# Altium PCB PCB_motor_driver_v2.PcbDoc
Units mil, origin at the board's own origin, x right, y up, seen from the top; angles counter-clockwise.
Board outline 801.46 x 841.6 mil, 4 copper layers (Top Layer, Signal Layer 1, Signal Layer 2, Bottom Layer), stack 15.634 mil thick; 56 components, 52 nets, 340 pads, 9 vias.
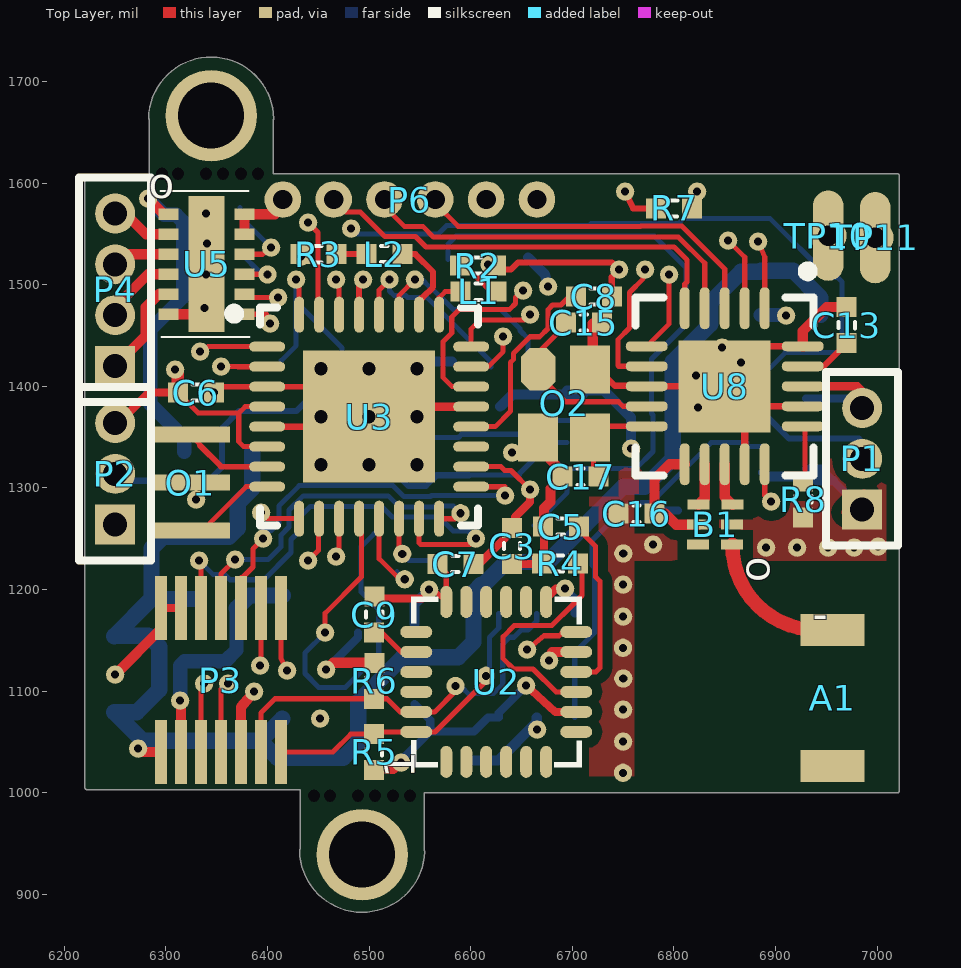
[diagram p0: Top Layer view]
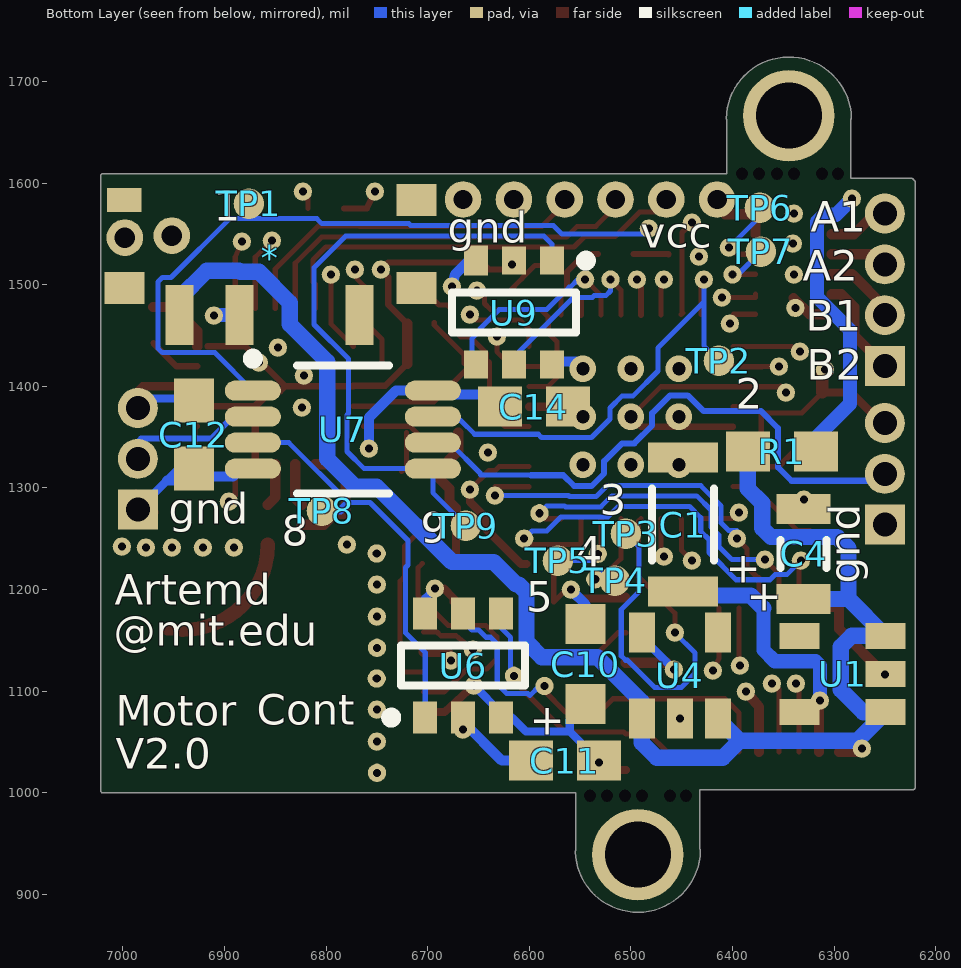
[diagram p1: Bottom Layer view, seen from below]
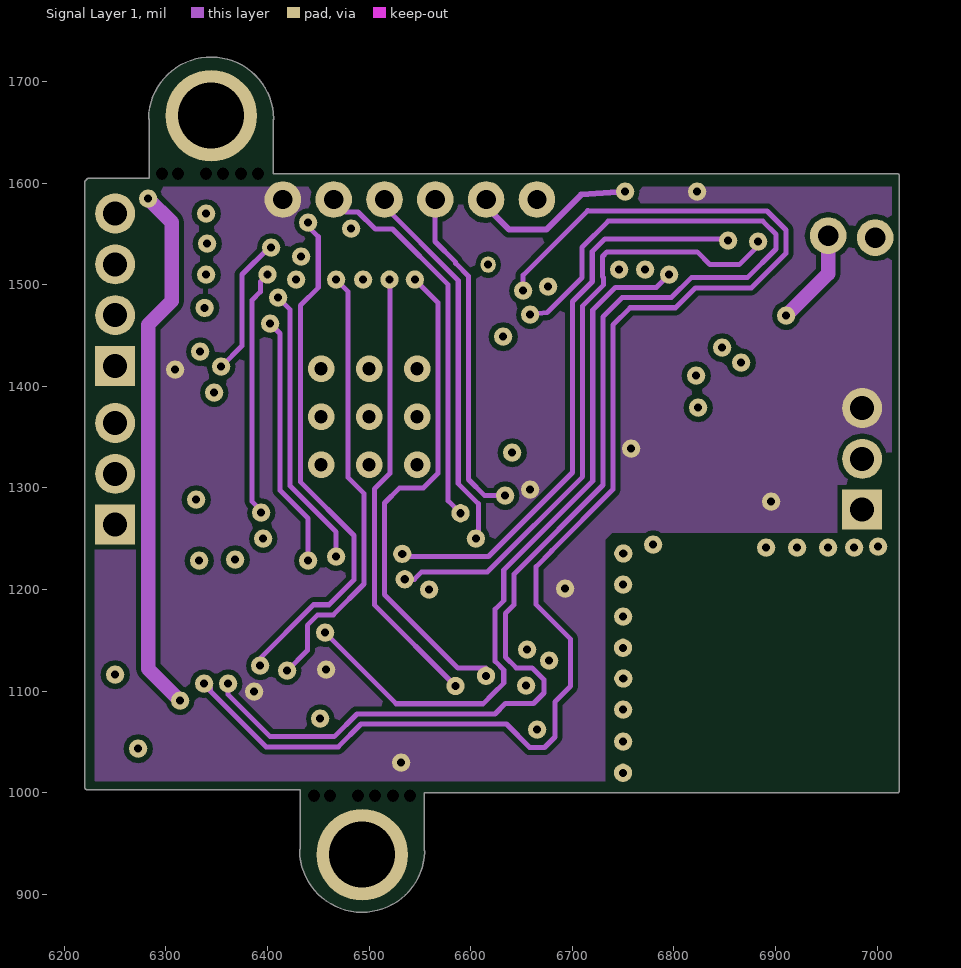
[diagram p2: Signal Layer 1]
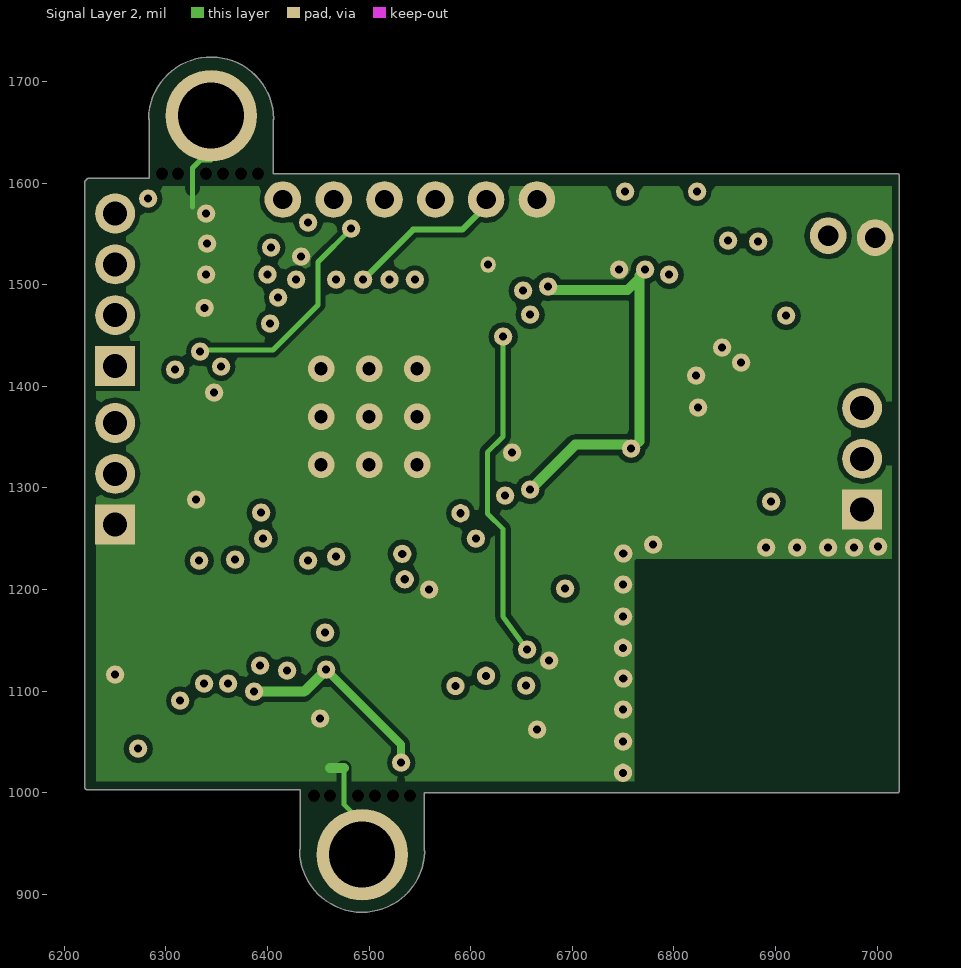
[diagram p3: Signal Layer 2]

## Layer stack, top to bottom
Top Solder: solder mask 0.4, Solder Resist, Dk 3.5
Top Layer: signal copper 1.4
Signal Layer 1: signal copper 1.417
Signal Layer 2: signal copper 1.417
Dielectric 1: core 10, FR-4, Dk 4.2
Bottom Layer: signal copper 1.4
Solder Side: solder mask 0.4, Solder Resist, Dk 3.5

## Board outline
6220.21,1005 ccw(c6222.19,1005) 6222.19,1003.02 6432.01,1003.02 ccw(c6432.01,1005) 6432.07,1003.02 ccw(c6434.06,1002.95) 6432.07,1002.95 6432.07,944.39 ccw(c6434.06,942.84) 6431.54,942.8 ccw(c6493.1,943.79) 6554.64,941.81 ccw(c6552.13,941.89) 6554.64,941.89 ccw(c6552.13,941.89) 6554.11,943.44 6554.11,999.73 7019.69,999.73 ccw(c7019.69,1001.71) 7021.67,1001.71 7021.67,1607.28 ccw(c7019.69,1607.28) 7019.69,1609.27 6405.53,1609.27 6405.49,1661.87 ccw(c6403.5,1663.42) 6406.02,1663.42 ccw(c6403.5,1663.42) 6406.02,1663.46 ccw(c6344.46,1662.47) 6282.92,1664.45 ccw(c6285.43,1664.37) 6283.45,1662.82 6283.45,1604.56 6223.64,1604.56 ccw(c6223.64,1602.58) 6221.72,1603.06 ccw(c6222.19,1601.13) 6220.21,1601.13

## Design rules (kind name [scope] priority, off if disabled: settings)
Clearance Clearance_3 [InNamedPolygon('GND-TOP')] p1: gap=10
Clearance Clearance_2 [InNamedPolygon('GND-TOP')] p2: gap=14
Clearance Clearance_1 [InNamedPolygon('GND-TOP')] p3: gap=15
Clearance [All] p4: gap=5
ComponentClearance [All] p1: gap=5 collisioncheckmode=3 verticalgap=0 showdistances=TRUE
PolygonConnect [All] p1: connectstyle=Direct reliefconductorwidth=10 reliefentries=4 polygonreliefangle="90 Angle" airgapwidth=10
RoutingLayers [All] p1: top layer_v5=FALSE mid layer 1_v5=TRUE mid layer 2_v5=TRUE bottom layer_v5=FALSE
RoutingVias [All] p1: holewidth=10 width=15 viastyle="Through Hole" minholewidth=8 minwidth=50 maxholewidth=8 maxwidth=50
SilkToSilkClearance [All] p1: silktosilkclearance=1
SilkToSolderMaskClearance [IsPad] p1: minsilkscreentomaskgap=1 clearancetoexposedcopper=TRUE
SolderMaskExpansion [All] p1: expansion=4
Width [All] p1: maxlimit=78.74 minlimit=5 preferedwidth=5
26 further rules are at their usual default settings.

## Components (designator, comment, footprint, x,y, rotation, side; value= is the part's Value field where it differs from the comment)
* "ON_OFF_SWITCH" SWTICH_SMD_SIDE 6775,1600 r0 bottom
A1 "2.45 GHz Chip antenna" 2450AT18A100E 6951.77,1149.61 r270 top
B1 "2.45 GHz Bulan" 2450BM14A0002 6856.3,1279.53 r270 top
C1 "100uF 6.3V" CAP1206 6448.82,1263.78 r90 bottom
C3 "0.1uF" 0402W 6640.75,1257.87 r270 top
C4 "10uF 16V" CAP0805 6330,1235 r90 bottom
C5 "0.1uF" 0402W 6703.74,1261.81 r180 top
C6 "0.1uF" 0402W 6344.49,1393.7 r180 top
C7 "10nF" 0402W 6600,1225 r180 top
C8 "0.1uF" 0402W 6736.22,1488.19 r180 top
C9 "2200pF" 0402W 6505,1160 r90 top
C10 "10uF 6.3V" "0805 TANTALUM" 6543.31,1098.43 r90 bottom
C11 "0.1uF" 0603W 6565.94,1031.5 r180 bottom
C12 "0.1uF" 0603W 6930.12,1351.38 r90 bottom
C13 "33nF X7R, +/- 10%" 0402W 6970,1445 r90 top
C14 "0.1uF" 0603W 6594.49,1379.92 r0 bottom
C15 "6pF NPO, +/- 2%" 0402W 6726.38,1462.6 r180 top
C16 "22pF 5%" 0402W 6748.03,1274.61 r0 top
C17 "6pF NPO, +/- 2%" 0402W 6692.91,1311.02 r0 top
L1 "LED" 0402W 6592.52,1493.11 r0 top
L2 "LED" 0402W 6530,1530 r180 top
O1 "8 MHz resonator" "Resonator SMD" 6325.79,1335.63 r0 top
O2 "16 MHz Crystal Cl=8pF" "2.5 x 2.0 crystal" 6716.54,1415.35 r270 top
P1 "MHDR1X3" MHDR1X3 6985.24,1278.54 r90 top
P2 "MHDR1X3" MHDR1X3 6250,1263.78 r90 top
P3 "CONN HEADER 14POS 3MM SMD 0.5MM" "DF12 14Pos" 6295,1040 r0 top
P4 "MHDR1X4" MHDR1X4 6250,1420 r90 top
P6 "6 pin smd 1.27mm female" "6pos 1.27mm" 6670.28,1896.65 r0 top
R1 "0 Ohm" 0603W 6350.39,1335.63 r0 bottom
R2 "330" 0402W 6622.05,1518.7 r180 top
R3 "330" 0402W 6435,1530 r0 top
R4 "4.7k" 0402W 6702.76,1225.39 r180 top
R5 "4.7K" 0402W 6505,1055 r270 top
R6 "4.7K" 0402W 6505,1095 r90 top
R7 "10k" 0402W 6785,1575 r0 top
R8 "22K 1%" 0402W 6927.17,1273.62 r90 top
TP1 "Test point small" "TEST POINT SMD SUPER SMALL"#1 6875.98,1579.72 r90 top
TP2 "Test point small" "TEST POINT SMD SUPER SMALL"#2 6413.39,1425.2 r90 bottom
TP3 "Test point small" "TEST POINT SMD SUPER SMALL"#2 6504.92,1254.92 r90 bottom
TP4 "Test point small" "TEST POINT SMD SUPER SMALL"#2 6515.75,1208.66 r90 bottom
TP5 "Test point small" "TEST POINT SMD SUPER SMALL"#2 6571.85,1228.35 r90 bottom
TP6 "Test point small" "TEST POINT SMD SUPER SMALL"#2 6373.03,1575.79 r90 bottom
TP7 "Test point small" "TEST POINT SMD SUPER SMALL"#2 6372.05,1532.48 r90 bottom
TP8 "Test point small" "TEST POINT SMD SUPER SMALL"#2 6804.13,1277.56 r90 bottom
TP9 "Test point small" "TEST POINT SMD SUPER SMALL"#2 6662.4,1262.8 r90 bottom
TP10 "Test point small" "TEST POINT SMD SUPER SMALL"#3 6951.77,1548.23 r270 top
TP11 "Test point small" "TEST POINT SMD SUPER SMALL"#4 6998.03,1546.26 r270 top
U1 "3.7V REG" SOT-23-5 6313.11,1095 r90 bottom
U2 "MPU 6050" QFN24 6585,1060 r90 top
U3 "ATmega328P-MUR" 32M1-A_M 6500,1370.08 r0 top
U4 "3.3 V REG" SOT-23-5 6473.43,1136.81 r180 bottom
U5 "DRV8835" WSON-16 6340,1520 r0 top
U6 "MCP4725" SOT23-6#1 6665,1125 r90 bottom
U7 "TS882IST" MiniS08 6783.46,1357.28 r180 bottom
U8 "nRF24L01+" QFN20 6850,1400 r270 top
U9 "MCP4725" SOT23-6#2 6615.16,1472.44 r270 bottom

## Footprints (in the part's own frame and the unit in brackets; to place one, negate y for a bottom-side part, rotate by r counter-clockwise, add the part's x,y. Pads: shape width x height; smd on the part's side, far side on the other; paste and mask are expansions set on the pad)
"2.5 x 2.0 crystal" [mm]
  oct 1.067x0.864 smd: 1(-0.033,-1.273)
  rect 1.2x1 smd: 2(1.667,-1.273) 3(1.667,0.026) 4(-0.033,0.025)
  body extent -0.46,-1.62 2.05,0.38, height 0.5
"6pos 1.27mm" [mil]
  round 36 hole 19: 1(-255.18,-312.9) 2(-205.22,-312.81) 3(-155.19,-312.82) 4(-105.18,-312.84) 5(-55.15,-312.85) 6(-5.14,-312.83)
32M1-A_M [mm] "QFN, 32-Leads, Body 5x5mm, Pitch 0.5mm, IPC Low Density"
  oval 0.9x0.25 smd: 1(-2.55,1.75) 2(-2.55,1.25) 3(-2.55,0.75) 4(-2.55,0.25) 5(-2.55,-0.25) 6(-2.55,-0.75) 7(-2.55,-1.25) 8(-2.55,-1.75) 17(2.55,-1.75) 18(2.55,-1.25) 19(2.55,-0.75) 20(2.55,-0.25) 21(2.55,0.25) 22(2.55,0.75) 23(2.55,1.25) 24(2.55,1.75)
  oval 0.25x0.9 smd: 9(-1.75,-2.55) 10(-1.25,-2.55) 11(-0.75,-2.55) 12(-0.25,-2.55) 13(0.25,-2.55) 14(0.75,-2.55) 15(1.25,-2.55) 16(1.75,-2.55) 25(1.75,2.55) 26(1.25,2.55) 27(0.75,2.55) 28(0.25,2.55) 29(-0.25,2.55) 30(-0.75,2.55) 31(-1.25,2.55) 32(-1.75,2.55)
  rect 3.3x3.3 smd: 33(0,0)
  silkscreen extent -3.5,-2.73 2.73,2.73, body extent -2.58,-2.58 2.58,2.58, height 1
0402W [mm]
  rect 0.5x0.5 smd: 1(-0.066,0) 2(0.834,-0.001)
  silkscreen extent 0.31,-0.2 0.46,0.2, body extent -0.08,-0.25 0.85,0.25, height 0.2
0603W [mm]
  rect 1.1x1 smd: 1(-0.825,0) 2(0.875,0)
  body extent -0.77,-0.4 0.83,0.4, height 0.8
"0805 TANTALUM" [mm]
  rect 1x1 smd: 1(-0.285,0.032) 2(1.716,0.032)
  body extent -0.28,-0.66 1.72,0.69, height 1.5
2450AT18A100E [mm] "Chip antenna 2.45 GHz"
  rect 0.8x1.6 smd: 1(-0.266,0.111) 2(3.135,0.111)
  body extent -0.14,-0.7 3.06,0.9, height 1.3
2450BM14A0002 [mm] "Balun for nRF8001"
  rect 0.25x0.55 smd: 1(0.901,0.027) 2(0.401,0.027) 3(-0.1,0.028) 4(-0.1,-0.822) 5(0.401,-0.823) 6(0.901,-0.823)
  body extent -0.39,-0.78 1.21,0.02, height 0.6
CAP0805 [mm] "Chip Capacitor, 2-Leads, Body 2.0x1.2mm, IPC Medium Density"
  rect 0.75x1.35 smd: 1(-1.125,0) 2(1.125,0)
  silkscreen extent -0.35,-0.58 0.35,0.58, body extent -1,-0.62 1,0.63, height 0.78
CAP1206 [mm] "Chip Capacitor, 2-Leads, Body 3.2x1.6mm, IPC Medium Density"
  rect 0.75x1.75 smd: 1(-1.675,0) 2(1.675,0)
  silkscreen extent -0.9,-0.77 0.9,0.77, body extent -1.6,-0.8 1.6,0.8, height 1
"DF12 14Pos" [mm] "0.5 mm header"
  rect 0.3x1.6 smd mask+0.07: 1(0,0) 2(0,3.6) 3(0.5,0) 4(0.501,3.6) 5(1,0) 6(1.001,3.6) 7(1.5,0) 8(1.5,3.6) 9(2,0) 10(2,3.6) 11(2.5,0) 12(2.5,3.6) 13(3,0) 14(3,3.6)
  body extent -1.77,-0.49 4.83,4.11, height 2.55
MHDR1X3 [mm] "Connector; Header; 3 Position"
  rect 1x1 hole 0.6: 1(0,0)
  round 1 hole 0.6: 2(1.27,0) 3(2.54,0)
  silkscreen extent -0.9,-0.9 3.44,0.9
MHDR1X4 [mm] "Connector; Header; 4 Position"
  rect 1x1 hole 0.6: 1(0,0)
  round 1 hole 0.6: 2(1.27,0) 3(2.54,0) 4(3.81,0)
  silkscreen extent -0.9,-0.9 4.71,0.9
MiniS08 [mm] "TSOP, 8-Leads, Body 3.00x2.95mm, Pitch 0.65mm, IPC Medium Density"
  oval 1.4x0.5 smd: 1(-2.25,0.975) 2(-2.25,0.325) 3(-2.25,-0.325) 4(-2.25,-0.975) 5(2.25,-0.975) 6(2.25,-0.325) 7(2.25,0.325) 8(2.25,0.975)
  silkscreen extent -2.38,-1.6 1.15,1.9, body extent -1.55,-1.6 1.55,1.6, height 1.1
QFN20 [mm] "QFN, 20-Leads, Body 4.00x4.00mm, Pitch 0.50mm, Thermal Pad 2.50x2.50mm, IPC Low Density"
  oval 1.05x0.25 smd: 1(-1.95,1) 2(-1.95,0.5) 3(-1.95,0) 4(-1.95,-0.5) 5(-1.95,-1) 11(1.95,-1) 12(1.95,-0.5) 13(1.95,0) 14(1.95,0.5) 15(1.95,1)
  oval 0.25x1.05 smd: 6(-1,-1.95) 7(-0.5,-1.95) 8(0,-1.95) 9(0.5,-1.95) 10(1,-1.95) 16(1,1.95) 17(0.5,1.95) 18(0,1.95) 19(-0.5,1.95) 20(-1,1.95)
  rect 2.3x2.3 smd: 21(0,0)
  silkscreen extent -3,-2.22 2.22,2.23, body extent -2.08,-2.07 2.07,2.08, height 0.8
QFN24 [mm] "pitch 0.5mm"
  oval 0.8x0.3 smd mask+0.07: 1(-0.756,0.231) 2(-0.756,-0.269) 3(-0.756,-0.768) 4(-0.756,-1.268) 5(-0.756,-1.768) 6(-0.755,-2.268) 13(3.244,-2.268) 14(3.244,-1.768) 15(3.244,-1.269) 16(3.244,-0.769) 17(3.244,-0.269) 18(3.244,0.231)
  oval 0.3x0.8 smd mask+0.07: 7(-0.006,-3.018) 8(0.494,-3.018) 9(0.994,-3.018) 10(1.494,-3.018) 11(1.994,-3.018) 12(2.494,-3.018) 19(2.494,0.981) 20(1.994,0.981) 21(1.494,0.981) 22(0.994,0.981) 23(0.494,0.981) 24(-0.006,0.981)
  silkscreen extent -0.9,-3.16 3.39,1.12, body extent -0.76,-3.02 3.24,0.98, height 1.1
"Resonator SMD" [mm]
  rect 2x0.4 smd: 1(-0.05,-1.975) 2(-0.051,-0.775) 3(-0.051,0.425)
  body extent -0.77,-2.35 0.8,0.8, height 1.15
SOT23-6#1 [mm] "SOT23, 6-Leads, Body 2.90x2.45mm, Pitch 0.95mm, IPC Medium Density"
  rect 0.8x0.6 smd: 1(-1.3,0.95) 2(-1.3,0) 3(-1.3,-0.95) 4(1.3,-0.95) 5(1.3,0) 6(1.3,0.95)
  silkscreen extent -1.42,-1.55 0.5,1.93, body extent -0.9,-1.55 0.9,1.55, height 1.45
SOT23-6#2 [mm] "SOT23, 6-Leads, Body 2.90x2.45mm, Pitch 0.95mm, IPC Medium Density"
  rect 0.7x0.6 smd: 1(-1.3,0.95) 2(-1.3,0) 4(1.3,-0.95) 5(1.3,0) 6(1.3,0.95)
  rect 0.75x0.6 smd: 3(-1.3,-0.95)
  silkscreen extent -1.42,-1.55 0.5,1.92, body extent -0.9,-1.55 0.9,1.55, height 1.45
SOT-23-5 [mm]
  rect 0.65x1 smd: 1(-0.4,-1.625) 2(0.55,-1.625) 3(1.5,-1.625) 4(1.5,0.525) 5(-0.4,0.525)
  body extent -0.77,-1.68 1.88,0.58, height 1.1
SWTICH_SMD_SIDE [mm]
  rect 0.7x1.5 smd: 1(-0.2,3.3) 2(2.8,3.3) 3(4.3,3.3)
  rect 1x0.8 smd: NC(-1.625,0.425) NC(-1.625,2.625) NC(5.675,2.625)
  rect 0.864x0.61 smd: NC(5.675,0.425)
  body extent -1.81,-1.27 5.89,3.73, height 1.4
"TEST POINT SMD SUPER SMALL"#1 [mil]
  round 30 smd far side: 0(0,0)
"TEST POINT SMD SUPER SMALL"#2 [mil]
  round 30 smd: 0(0,0)
"TEST POINT SMD SUPER SMALL"#3 [mil]
  oval 89x30 smd: 0(0,0)
"TEST POINT SMD SUPER SMALL"#4 [mil]
  oval 90x30 smd: 0(0,0)
WSON-16 [mm]
  rect 0.9x3.4 smd: 0(0.001,0.003)
  rect 0.5x0.28 smd mask+0.07: 1(-0.949,1.253) 2(-0.949,0.753) 3(-0.949,0.253) 4(-0.949,-0.247) 5(-0.949,-0.747) 6(-0.949,-1.247) 7(0.951,-1.247) 8(0.951,-0.747) 9(0.951,-0.247) 10(0.951,0.253) 11(0.951,0.753) 12(0.951,1.253)
  silkscreen extent -1.15,-1.82 1.08,1.83, body extent -1,-1.5 1,1.5, height 0.8

## Part data
*: "SPDT SMD Side Switch"
A1: "for Bluetooth"
B1: "for nRF8001 chip"
C1 C4 C10: library part Capacitor_pol, "Polarised capacitor"
C3 C5 C6 C7 C8 C9 C11 C12 C13 C14 C15 C16 C17: library part Capacitor, "SMD Cap 1206"
L1 L2: "LED SMD 1206/0603"
O1: library part "Resonator SMD", "Build in caps"
O2: library part "16 MHz Crystal Wireless", "For BLE use"
P1 P2: "Header, 3-Pin"
P4: "Header, 4-Pin"
R1 R2 R3 R4 R5 R6 R7 R8: library part Resistor
U1 U4: library part MIC5205_VOLTAGE_REG, "5V LDO SMD"
U2: library part MPU_6500, "Gyro / accelerometer combo"
U3: "8-bit AVR Microcontroller, 32KB Flash, 1KB EEPROM, 2KB SRAM, 32-pin MLF, Industrial Grade (-40°C to 85°C)"
U6 U9: "12bit DAC"
U7: "Rail-to-rail 1.1 V dual comparatpr"
U8: "2.4 GHz Radio"

## Free pads (board coordinates)
  round 18 hole 8: 0(6250,1116.14) 0(6272.64,1043.31) 0(6282.48,1584.65) 0(6309.06,1416.34) 0(6313.98,1090.55) 0(6329.72,1288.39) 0(6332.68,1228.35) 0(6333.66,1434.06) 0(6337.6,1107.28) 0(6338.07,1477.13) 0(6339.57,1509.84) 0(6339.57,1569.88) 0(6340.55,1540.35) 0(6347.44,1393.7) 0(6354.33,1419.29) 0(6361.22,1107.28) 0(6368.11,1229.33) 0(6386.81,1099.41) 0(6392.72,1125) 0(6393.7,1275.59) 0(6395.67,1250) 0(6400,1510) 0(6402.56,1461.61) 0(6403.54,1536.42) 0(6410.43,1487.2) 0(6419.29,1120.08) 0(6428.15,1504.92) 0(6433.07,1527.56) 0(6439.96,1228.35) 0(6439.96,1561.02) 0(6451.77,1072.83) 0(6456.69,1157.48) 0(6457.68,1121.06) 0(6467.52,1232.28) 0(6467.52,1504.92) 0(6482.28,1555.12) 0(6494.09,1504.92) 0(6520,1505) 0(6531.5,1029.53) 0(6532.6,1235.01) 0(6535,1210) 0(6545,1505) 0(6559.06,1199.8) 0(6585,1105) 0(6590,1275) 0(6605,1250) 0(6615,1115) 0(6631.89,1448.82) 0(6633.86,1292.32) 0(6640.75,1334.65) 0(6651.57,1494.09) 0(6654.53,1105.32) 0(6655.51,1140.75) 0(6658.46,1298.23) 0(6658.46,1470.47) 0(6665.35,1062.01) 0(6676.18,1498.03) 0(6677.17,1129.92) 0(6692.91,1200.79) 0(6746.06,1514.76) 0(6749.84,1019.53) 0(6749.84,1142.56) 0(6750,1050.2) 0(6750,1081.69) 0(6750,1173.23) 0(6750,1204.72) 0(6750.16,1112.36) 0(6750.16,1235.39) 0(6751.97,1591.54) 0(6757.87,1338.58) 0(6771.65,1514.76) 0(6779.53,1244.09) 0(6795.28,1509.84) 0(6821.85,1410.43) 0(6822.83,1591.54) 0(6823.82,1378.94) 0(6847.44,1437.99) 0(6853.35,1543.31) 0(6866.14,1423.23) 0(6882.87,1542.32) 0(6890.75,1241.14) 0(6895.67,1286.42) 0(6910.43,1469.49) 0(6921.26,1241.14) 0(6951.77,1241.14) 0(6977.36,1241.14) 0(7000.98,1242.13)
  round 10 hole 12: 0(6296.26,1609.25) 0(6312.01,1609.25) 0(6339.57,1609.25) 0(6356.3,1609.25) 0(6374.02,1609.25) 0(6445.87,997.05) 0(6461.61,997.05) 0(6489.17,997.05) 0(6505.91,997.05) 0(6523.62,997.05)
  round 8 hole 12: 0(6390.71,1609.21) 0(6540.32,997.01)
  oval 15x16 hole 8: 0(6617.13,1519.68)
  round 36 hole 20: 0(6951.77,1548.23) 0(6998.03,1546.26)
  round 90 hole 64.96: 1(6344.49,1666.34) 1(6493.11,938.98)

## Via types
v1: diameter 25.98, hole 12.99, Top Layer to Bottom Layer, tented top, 9 vias

## Nets (pads, with @x,y where several pads share a name; then routed paths per layer and width w, separated by ;. In a path a pad name is that pad's centre, name@x,y a point inside that pad or via, vN(x,y) a via of type N, cw(c..) or ccw(c..) an arc to the next point about the centre after c; other vN are vias at no path point)
A6: U3.19
A7: P3.5 pad.0@6337.6,1107.28 pad.0@6651.57,1494.09 U3.22 | length 1631.8
  Top Layer w5: P3.5 6334.38,1106.04 pad.0@6337.6,1107.28 ; U3.22 6581.69,1399.61 6572.83,1408.46 6572.83,1444.05 6581.32,1452.53 6581.32,1468.13 6588.94,1475.75 6612.39,1475.75 ; 6612.42,1475.72 6638.32,1475.72 6644.04,1481.45 6644.04,1487.55 pad.0@6651.57,1494.09
  Signal Layer 1 w5: pad.0@6337.6,1107.28 6343.81,1103.04 6343.81,1099.72 6398.42,1045.12 6469.69,1045.12 6492.08,1067.5 6635.11,1067.5 6658.11,1044.51 6672.6,1044.51 6682.85,1054.76 6682.85,1089.35 6698.38,1104.87 6698.38,1151.03 6664.37,1185.04 6664.37,1222.44 6679.74,1237.81 6679.74,1238.19 6740.12,1298.56 6740.12,1460.49 6756.89,1477.26 6801.59,1477.26 6821.21,1496.89 6876.33,1496.89 6910.37,1530.93 6910.37,1553.71 6891.59,1572.5 6715.52,1572.5 6715.19,1572.83 6651.57,1509.22 pad.0@6651.57,1494.09
AD0: R4.1 U2.9 | length 234.5
  Top Layer w5: U2.9 6684.03,1099.14 6661.36,1121.82 6641.96,1121.82 6631.89,1131.89 6631.89,1153.54 6642.8,1164.46 6679.85,1164.46 6699.68,1184.29 6699.75,1184.29 6709.41,1193.95 6709.41,1221.35 R4.1
AINT1: pad.0@6354.33,1419.29 pad.0@6403.54,1536.42 TP6.0 U3.2 U5.10 | length 264.3
  Top Layer w5: pad.0@6354.33,1419.29 6370.79,1419.21 U3.2@6399.61,1419.21 ; U5.10 6394.96,1529.96 pad.0@6403.54,1536.42
  Signal Layer 1 w5: pad.0@6354.33,1419.29 6374.9,1439.86 6374.9,1509.9 6401.42,1536.42 pad.0@6403.54,1536.42
  Bottom Layer w5: TP6.0 6373.03,1566.93 pad.0@6403.54,1536.42
AINT2: pad.0@6393.7,1275.59 pad.0@6400,1510 TP7.0 U3.9 U5.9 | length 343.8
  Top Layer w5: U5.9 6399.72,1510.28 pad.0@6400,1510 ; pad.0@6393.7,1275.59 6399.61,1269.68 U3.9
  Signal Layer 1 w5: pad.0@6393.7,1275.59 6392.72,1278.6 6384.9,1286.42 6384.9,1484.9 6392.93,1492.93 6392.93,1502.93 pad.0@6400,1510
  Bottom Layer w5: TP7.0 6394.53,1510 pad.0@6400,1510
AOUT1: P4.4 U5.2 | length 61.1
  Top Layer w10: P4.4 6260,1570 6280.35,1549.65 U5.2
AOUT2: P4.3 U5.3 | length 56.8
  Top Layer w10: P4.3 6259.96,1529.96 U5.3
BIN1: pad.0@6410.43,1487.2 pad.0@6467.52,1232.28 U3.11 U5.8 | length 355.7
  Top Layer w5: U5.8 6377.45,1487.5 pad.0@6410.75,1487.5 ; pad.0@6410.43,1487.2 pad.0@6410.75,1487.5 ; pad.0@6412.25,1487.5 pad.0@6410.75,1487.5 ; pad.0@6467.52,1232.28 6470.47,1234.53 U3.11@6470.47,1269.61
  Signal Layer 1 w5: pad.0@6410.43,1487.2 6422.26,1475.37 6422.26,1301.78 6467.52,1256.53 pad.0@6467.52,1232.28
BIN2: pad.0@6402.56,1461.61 pad.0@6439.96,1228.35 U3.10 U5.7 | length 316.2
  Top Layer w5: U5.7 6399.09,1470.91 ; pad.0@6439.96,1228.35 6450.02,1238.41 6450.02,1268.92 U3.10
  Signal Layer 1 w5: pad.0@6402.56,1461.61 6412.26,1451.91 6412.26,1297.64 6439.96,1269.94 pad.0@6439.96,1228.35
BOUT1: P4.2 U5.4 | length 74
  Top Layer w10: P4.2 6250,1478.02 6282.26,1510.28 U5.4
BOUT2: P4.1 U5.5 | length 98.1
  Top Layer w10: P4.1 6280,1450 6280,1477.76 6292.83,1490.59 U5.5
CE: pad.0@6535,1210 pad.0@6882.87,1542.32 TP4.0 U3.13 U8.1 | length 765
  Top Layer w5: U3.13@6509.84,1269.61 6509.84,1230.16 6530,1210 pad.0@6535,1210 ; pad.0@6882.87,1542.32 6889.37,1527.17 U8.1
  Signal Layer 1 w5: pad.0@6535,1210 6544.5,1210 6551.81,1217.3 6616.43,1217.3 6710.12,1310.99 6710.12,1479.18 6730.46,1499.52 6730.46,1507.03 6729.56,1507.93 6729.56,1527.63 6734.19,1532.26 6822.89,1532.26 6835.47,1519.68 6864.17,1519.68 6882.87,1538.39 pad.0@6882.87,1542.32
  Bottom Layer w5: TP4.0@6527.49,1217.51 pad.0@6535,1210
CSN: pad.0@6532.6,1235.01 pad.0@6853.35,1543.31 TP5.0 U3.14 U8.2 | length 719.8
  Top Layer w5: U3.14@6529.53,1269.61 6529.53,1235.47 pad.0@6530,1235 ; pad.0@6853.35,1543.31 6869.69,1526.97 U8.2
  Signal Layer 1 w5: pad.0@6532.6,1235.01 6532.6,1232.5 6617.48,1232.5 6700.12,1315.13 6700.12,1483.32 6719.94,1503.15 6719.94,1503.41 6719.56,1503.79 6719.56,1532.56 6732.01,1545 6851.65,1545 pad.0@6853.35,1543.31
  Bottom Layer w5: pad.0@6532.6,1235.01 6539.27,1228.35 TP5.0
GND: B1.2 C1.2 C3.2 C4.2 C5.2 C6.1 C7.2 C8.1 C9.2 C10.2 C11.1 C12.1 C13.2 C14.1 C15.1 C16.1 C17.1 O1.2 O2.2 O2.4 P1.1 P2.1 P3.2 P3.4 P6.6 pad.0@6250,1116.14 pad.0@6329.72,1288.39 pad.0@6338.07,1477.13 pad.0@6339.57,1509.84 pad.0@6339.57,1569.88 pad.0@6340.55,1540.35 pad.0@6347.44,1393.7 pad.0@6433.07,1527.56 pad.0@6451.77,1072.83 pad.0@6559.06,1199.8 pad.0@6617.13,1519.68 pad.0@6640.75,1334.65 pad.0@6665.35,1062.01 pad.0@6677.17,1129.92 pad.0@6746.06,1514.76 pad.0@6749.84,1019.53 pad.0@6749.84,1142.56 pad.0@6750,1050.2 pad.0@6750,1081.69 pad.0@6750,1173.23 pad.0@6750,1204.72 pad.0@6750.16,1112.36 pad.0@6750.16,1235.39 pad.0@6779.53,1244.09 pad.0@6821.85,1410.43 pad.0@6823.82,1378.94 pad.0@6847.44,1437.99 pad.0@6866.14,1423.23 pad.0@6890.75,1241.14 pad.0@6921.26,1241.14 pad.0@6951.77,1241.14 pad.0@6977.36,1241.14 pad.0@6998.03,1546.26 pad.0@7000.98,1242.13 pad.1 R2.1 R3.1 R4.2 R8.1 TP11.0 U1.2 U2.11 U2.18 U3.3 U3.5 U3.21 U3.33 U4.2 U5.0 U5.6 U6.2 U7.4 U8.8 U8.14 U8.17 U8.20 U8.21 U9.2 U9.6 | length 2033.5
  Top Layer w5: pad.0@6352.6,1400.01 6353.09,1399.53 6470.47,1399.53 U3.33@6500,1370 ; pad.0@6559.06,1197.83 6565.76,1197.83 U2.18 6575.89,1216.3 C7.2
  Top Layer w6: U3.5 6490.16,1360.16 U3.33@6500,1370 ; pad.0@6617.13,1519.68 R2.1@6626,1514.78 ; R2.1@6624.65,1514.78 R2.1@6626,1514.78 ; O2.4@6720.12,1422.17 6741.79,1400.5 6773.23,1400.5 U8.8 U8.21@6840,1400 ; C15.1@6720.12,1461.63 6738.82,1480.33 C8.1 6738.82,1507.52 6746.06,1514.76 6738.94,1521.89 6646.65,1521.89 6639.54,1514.78 R2.1@6626,1514.78 ; U8.21@6845,1395 U8.21@6840,1400 ; U8.21@6869.69,1380.32 U8.17@6916.77,1380.32 ; U8.20@6916.77,1439.37 6879.37,1439.37 U8.21@6840,1400
  Top Layer w7: U8.21 6869.69,1380.32 U8.14
  Top Layer w8: P3.2 P3.4 ; C9.2 6505.05,1191 6552.22,1191 pad.0@6559.06,1197.83 ; U3.33@6547.24,1370 6557.09,1379.84 U3.21@6600.39,1379.84 ; C3.2@6643.66,1225.02 R4.2@6672.13,1225.02 ; R4.2@6672.15,1225.05 C5.2@6672.15,1260.05
  Top Layer w10: pad.0@6250,1116.14 6295.01,1161.15 P3.2 ; U5.6 6324.09,1470.91 U5.0@6340.05,1486.86 ; P6.6@6664.86,1577.17 P6.6@6667.6,1574.42 ; O2.2@6669.88,1354.36 6669.88,1336.37 C17.1@6690.31,1315.93 ; C5.2@6672.15,1260.05 6672.15,1279.97 6678.46,1286.28 6678.46,1299.16 C17.1 ; pad.0@6677.17,1129.92 6679.84,1138.5 U2.11 ; O2.4@6720.12,1422.17 C15.1@6720.12,1461.63 ; U8.20 6926.77,1454.33 6950.29,1477.85 C13.2 ; P1.1@6969.84,1275.94 P1.1@6987.2,1293.31
  Signal Layer 2 w5: 6326.07,1576.49 6326.07,1614.84 6333.98,1622.75 6344.49,1622.75 pad.1@6344.49,1666.34 ; pad.1@6474.41,957.68 6493.11,938.98 6493.11,970.47 6475.11,988.47 6475.11,1024.33
  Signal Layer 2 w10: 6461.33,1024.33 6475.11,1024.33
  Bottom Layer w8: C12.1 6944.88,1318.9 6956.69,1307.09 P1.1
  Bottom Layer w10: C10.2 6544.57,1185.32 pad.0@6559.06,1199.8 ; v1(6547.24,1417.32) 6554.13,1424.21 U9.6@6581.69,1424.21 ; C11.1 6626.98,1031.5 6665,1069.52 U6.2 ; U7.4@6887.8,1314.96 6891.73,1311.02 C12.1@6940.94,1311.02 ; C12.1@6940.94,1307.09 6956.69,1307.09
  other v1: 6452.76,1322.83 6500,1322.83 6547.24,1322.83 6452.76,1370.08 6500,1370.08 6547.24,1370.08 6452.76,1417.32 6500,1417.32
INT0: pad.0@6428.15,1504.92 TP2.0 U3.32 U7.7 | length 485.7
  Top Layer w5: pad.0@6428.15,1504.92 6431.1,1501.97 U3.32
  Bottom Layer w5: TP2.0 6428.15,1439.96 6428.15,1482.91 ; pad.0@6428.15,1504.92 6428.15,1482.91 ; U7.7@6710.63,1366.14 6667.1,1366.14 6653.7,1352.74 6591.16,1352.74 6588.01,1349.59 6538.76,1349.59 6520.49,1367.85 6520.49,1378.57 6508.49,1390.57 6497.77,1390.57 6473.25,1415.09 6473.25,1437.82 6428.15,1482.91
INT1: pad.0@6333.66,1434.06 pad.0@6482.28,1555.12 TP1.0 U3.1 U7.1 | length 980
  Top Layer w5: 6341.54,1438.98 U3.1
  Signal Layer 1 w5: pad.0@6482.28,1555.12 pad.0@6482.28,1557.15
  Signal Layer 2 w5: pad.0@6333.66,1434.06 6335.4,1435.79 6405.28,1435.79 6449.57,1480.08 6449.57,1522.41 pad.0@6482.28,1555.12
  Bottom Layer w5: pad.0@6482.28,1555.12 6487.58,1549.82 6567.91,1549.82 6576.4,1558.31 6716.77,1558.31 6718.48,1560.02 6804.13,1560.02 6809.07,1564.96 6894.69,1564.96 6952.54,1507.11 6961.18,1507.11 6965.57,1502.71 6965.57,1437.44 6961.18,1433.05 6909.43,1433.05 U7.1 ; U7.1@6887.8,1391.73 U7.1@6890.5,1391.73
INT_IMU: pad.0@6631.89,1448.82 pad.0@6655.51,1140.75 U2.12 U3.23 | length 450.5
  Top Layer w5: U3.23@6585.63,1419.29 U3.23 6617.13,1419.29 6631.89,1434.06 pad.0@6631.89,1448.82 ; pad.0@6655.51,1140.75 6672.17,1154.46 6687.01,1154.46 6690.73,1158.18 U2.12
  Signal Layer 2 w5: pad.0@6631.89,1448.82 6631.89,1350.54 6616.36,1335 6616.36,1274.82 6631.89,1259.29 6631.89,1173.23 pad.0@6655.51,1140.75
IRQ: pad.0@6456.69,1157.48 pad.0@6795.28,1509.84 TP3.0 U3.12 U8.6 | length 1193.4
  Top Layer w5: pad.0@6456.69,1157.48 6456.69,1176.69 6492.5,1212.5 6492.5,1267.26 U3.12@6490.16,1269.61 ; U8.6 6795.28,1461.42 pad.0@6795.28,1509.84
  Signal Layer 1 w5: pad.0@6456.69,1157.48 6526.67,1087.5 6612.2,1087.5 6622.2,1097.5 ; 6622.25,1097.5 6632.5,1107.75 6632.5,1120.83 6624.02,1129.32 6624.02,1180.49 6632.5,1188.98 6632.5,1219.23 6720.12,1306.85 6720.12,1475.04 6742.34,1497.26 6782.7,1497.26 pad.0@6795.28,1509.84
  Bottom Layer w5: pad.0@6456.69,1157.48 6436.79,1137.58 6436.79,1117.2 6450.43,1103.56 6476.59,1103.56 6503.33,1130.3 6505.08,1130.3 6509.47,1134.69 6509.47,1180.27 6492.13,1197.61 6492.13,1242.13 TP3.0
LED_BLUE: L1.1 U3.25 | length 40.3
  Top Layer w5: U3.25@6568.9,1470.39 U3.25 6568.9,1487.2 6574.79,1493.1 L1.1
LED_RED: L2.1 U3.26 | length 86
  Top Layer w6: L2.1 6545.46,1530 6563,1512.46 6563,1497.54 6552.46,1487 6551.44,1487 6549.21,1484.77 U3.26@6549.21,1470.39
MISO: P3.8 P6.2 pad.0@6368.11,1229.33 pad.0@6590,1275 U3.16 U8.5 | length 1147.3
  Top Layer w5: P3.8 6354.07,1215.29 pad.0@6368.11,1229.33 ; P6.2 6477.28,1571.62 6491.24,1571.62 6515.47,1547.39 6545.52,1547.39 6555.92,1536.99 6800.22,1536.99 6812.78,1524.43 6812.78,1502.59 6810.63,1500.45 U8.5 ; U3.16@6568.9,1269.61 6584.61,1269.61 pad.0@6590,1275
  Signal Layer 1 w5: P6.2 6477.28,1571.62 6489.12,1571.62 6506.06,1554.68 6523.08,1554.68 6577.74,1500.02 6577.74,1287.26 pad.0@6590,1275
  Bottom Layer w5: pad.0@6368.11,1229.33 6400.43,1229.33 6413.17,1242.07 6413.17,1253.36 6421.2,1261.39 6421.2,1278.12 6435.24,1292.17 6518.7,1292.17 6529.52,1281.34 6564.43,1281.34 6565.26,1282.18 6582.82,1282.18 pad.0@6590,1275
MOSI: P3.6 P6.3 pad.0@6332.68,1228.35 pad.0@6605,1250 U3.15 U8.4 | length 1218.1
  Top Layer w5: pad.0@6332.68,1228.35 6334.39,1226.63 P3.6 ; P6.3@6514.81,1577.18 6534.6,1557.39 6552.78,1557.39 6563.15,1547.01 6804.34,1547.01 6830.31,1521.04 U8.4 ; U3.15@6549.21,1269.61 6549.21,1245.79 6550.61,1244.39 6599.39,1244.39 pad.0@6605,1250
  Signal Layer 1 w5: P6.3@6514.81,1577.18 6585.36,1506.62 6585.36,1506.53 6587.74,1504.16 6587.74,1304.13 6607.5,1284.37 6607.5,1252.5 pad.0@6605,1250
  Bottom Layer w5: pad.0@6332.68,1228.35 6346.46,1214.57 6358.09,1214.57 6363.1,1209.56 6396.42,1209.56 6423.17,1236.3 6423.17,1249.22 6431.2,1257.25 6431.2,1270.67 6442.16,1281.63 6512.35,1281.63 6522.63,1271.34 6568.91,1271.34 6582.75,1257.5 6597.25,1257.5 6597.37,1257.63 pad.0@6605,1250
NetA1_1: A1.1 B1.1 | length 146.7
  Top Layer w11: A1.1@6941.36,1160.08 A1.1
  Top Layer w14: B1.1 ccw(c6941.36,1244.07) A1.1@6941.36,1160.08
NetB1_3: B1.3 U8.13 | length 42.8
  Top Layer w10: U8.13 6850,1290.84 B1.3
NetB1_4: B1.4 U8.12 | length 42.4
  Top Layer w10: B1.4 6830.31,1289.83 U8.12
NetB1_5: B1.5 C16.2 U8.11 | length 117.3
  Top Layer w10: U8.11 6795.67,1323.23 6780.88,1308.44 C16.2 6791.38,1274.56 6802.19,1263.76 B1.5
NetC5_1: C5.1 U2.10 | length 172.5
  Top Layer w5: U2.10 6723.16,1118.83 6727.07,1122.74 6727.07,1208.09 6722.7,1212.46 6722.7,1242.55 6706.34,1258.91 C5.1
NetC8_2: C8.2 U3.20 | length 198.6
  Top Layer w5: U3.20 6624.02,1360.24 6639.23,1375.45 6639.23,1423.5 6641.91,1426.18 6641.91,1432.24 6658.41,1448.74 6667.87,1448.74 6676,1456.87 6676,1467.13 6676.19,1467.32 6676.19,1475.59 6680.58,1479.99 6688.85,1479.99 6697.1,1488.23 C8.2
NetC9_1: C9.1 U2.20 | length 49.2
  Top Layer w5: C9.1 6512.6,1157.4 6531.51,1138.49 U2.20
NetC13_1: C13.1 U8.19 | length 52.6
  Top Layer w6: U8.19 6947.3,1419.69 C13.1
NetC15_2: C15.2 O2.1 U8.9 | length 181.3
  Top Layer w5: O2.1@6659.87,1418.5 6693.59,1384.78 6745.22,1384.78 6749.69,1380.32 U8.9 ; O2.1@6664.44,1422.54 6664.44,1431.17 6693.53,1460.26 C15.2
NetC17_2: C17.2 O2.3 U8.10 | length 106.8
  Top Layer w5: O2.3@6702.85,1346.21 6717.27,1360.63 U8.10@6763.23,1360.63 ; O2.3@6721.01,1354.37 6721.01,1320.65 C17.2@6725.76,1315.9
NetL1_2: L1.2 R2.2 | length 46.9
  Top Layer w5: R2.2 6594.56,1518.75 6607.31,1506 6607.31,1505.76 6620.01,1493.06 L1.2
NetL2_2: L2.2 R3.2 | length 34.3
  Top Layer w6: R3.2@6462.85,1529.95 6462.94,1530.05 L2.2
NetO1_1: O1.1 U3.8 | length 93.7
  Top Layer w5: O1.1 6335.63,1257.87 6378.94,1301.18 U3.8
NetO1_3: O1.3 U3.7 | length 164.1
  Top Layer w5: O1.3 6355.29,1320.87 U3.7 ; 6333.01,1341.73 6353.95,1320.79 U3.7@6399.61,1320.79
NetP1_2: P1.2 U7.2 | length 126.2
  Bottom Layer w6: U7.2 6891.73,1370.08 6913.26,1348.55 6981.96,1348.55 P1.2@6987.2,1343.31
NetP2_2: P2.2 U7.6 | length 575
  Bottom Layer w5: 6598.19,1312.45 6647.94,1312.45 6647.94,1314.19 6678.23,1344.49 U7.6
  Bottom Layer w6: P2.2 6256.82,1306.96 6341.9,1306.96 6355.19,1320.25 6355.19,1358.84 6372.05,1375.7 6428.69,1375.7 6444.06,1391.07 6461.45,1391.07 6479.01,1373.51 6479.01,1361.38 6496.56,1343.83 6508.7,1343.83 6526.25,1326.27 6526.25,1314.14 6538.55,1301.84 6555.94,1301.84 6566.55,1312.45 6598.19,1312.45
NetR8_2: R8.2 U8.16 | length 44.1
  Top Layer w5: U8.16 6928.92,1358.48 6928.92,1317.38
PC1: P3.7 pad.0@6361.22,1107.28 pad.0@6658.46,1470.47 U3.24 | length 1458.2
  Top Layer w5: P3.7 6354.06,1102.09 pad.0@6361.22,1107.28 ; U3.24 6600.39,1456.54 6609.25,1465.39 6652.4,1465.39 pad.0@6658.46,1470.47
  Signal Layer 1 w5: pad.0@6361.22,1107.28 6361.22,1096.46 6402.56,1055.12 6465.55,1055.12 6487.93,1077.5 6623.76,1077.5 6634.07,1087.82 6661.78,1087.82 6672.03,1098.07 6672.03,1111.15 6660.36,1122.82 6644.66,1122.82 6634.02,1133.46 6634.02,1176.35 6642.5,1184.83 6642.5,1215.09 6730.12,1302.71 6730.12,1468.37 6749.02,1487.26 6797.45,1487.26 6817.07,1506.89 6872.19,1506.89 6900.37,1535.07 6900.37,1549.57 6887.45,1562.5 6735.37,1562.5 6709.56,1536.7 6709.56,1506.91 6675.09,1472.44 pad.0@6658.46,1470.47
RESET: P6.5 pad.0@6494.09,1504.92 pad.0@6751.97,1591.54 R7.1 U3.29 | length 389.1
  Top Layer w6: U3.29@6490.16,1470.39 U3.29 6490.16,1502.23 pad.0@6494.09,1504.92 ; pad.0@6751.97,1591.54 6759.99,1574.99 R7.1
  Signal Layer 1 w6: P6.5@6614.85,1577.15 6637.84,1554.17 6674.38,1554.17 6708.8,1588.58 pad.0@6751.97,1591.54
  Signal Layer 2 w6: pad.0@6494.09,1504.92 6543.31,1554.13 6591.83,1554.13 P6.5@6614.85,1577.15
RX: P3.14 pad.0@6419.29,1120.08 pad.0@6467.52,1504.92 U3.30 | length 535.5
  Top Layer w5: P3.14 6413.11,1132.17 pad.0@6419.29,1120.08 ; pad.0@6467.52,1504.92 6470.47,1501.97 U3.30 U3.30@6470.47,1470.39
  Signal Layer 1 w5: pad.0@6419.29,1120.08 6439.19,1139.98 6439.19,1164.73 6449.44,1174.98 6464.71,1174.98 6495.02,1205.29 6495.02,1211.53 6495.1,1211.61 6495.1,1294.27 6479.33,1310.04 6479.33,1493.11 pad.0@6467.52,1504.92
SCK: P3.10 P6.4 pad.0@6395.67,1250 pad.0@6633.86,1292.32 U3.17 U8.3 | length 1075.8
  Top Layer w5: P3.10 6373.75,1211.83 6375.36,1211.83 6385.61,1222.08 6385.61,1239.94 pad.0@6395.67,1250 ; P6.4@6565.09,1579.88 6587.6,1557.37 6767.12,1557.37 6767.39,1557.64 6804.87,1557.64 ; U3.17@6600.39,1301.1 6633.9,1301.1 pad.0@6633.86,1292.32 ; 6804.9,1557.61 6807.88,1557.61 6850,1515.49 U8.3
  Signal Layer 1 w5: P6.4@6564.82,1577.16 6564.82,1542.46 6585.14,1522.15 6585.14,1520.99 6597.74,1508.39 6597.74,1308.28 6613.69,1292.32 pad.0@6633.86,1292.32
  Bottom Layer w5: pad.0@6395.67,1250 6395.67,1258.09 6403.76,1258.09 6411.2,1265.53 6411.2,1282.26 6431.1,1302.17 6523.38,1302.17 6534.2,1291.34 6560.29,1291.34 6561.45,1292.5 6633.86,1292.5 pad.0@6633.86,1292.32
SCL: P3.11 pad.0@6520,1505 pad.0@6585,1105 R6.1 U2.23 U3.28 U6.5 U9.5 | length 1017.9
  Top Layer w5: P3.11 6393.42,1078.42 6407.4,1092.4 R6.1 6517.6,1092.4 6530.55,1079.45 U2.23 6564.45,1079.45 pad.0@6585,1100 ; U3.28@6509.84,1470.39 6509.84,1494.84 pad.0@6520,1505
  Signal Layer 1 w5: pad.0@6520,1505 6520.49,1504.51 6520.49,1314.35 6505.1,1298.96 6505.1,1184.9 pad.0@6585,1105
  Bottom Layer w5: pad.0@6520,1505 6520,1493.78 6524.61,1489.17 6536.08,1489.17 6537.75,1487.5 6556.57,1487.5 6619.09,1424.98 U9.5@6619.09,1424.21 ; pad.0@6585,1105 6589.88,1105 6599.41,1095.47 6601.44,1097.5 6622.25,1097.5 6631.5,1106.75 6631.5,1146.26 6638.17,1152.93 6642.52,1152.93 6649.78,1160.2 6656.26,1160.2 6665,1168.94 U6.5 ; U9.5@6620,1418.82 U9.5@6620,1424.21
SDA: P3.13 pad.0@6545,1505 pad.0@6615,1115 R5.1 U2.24 U3.27 U6.4 U9.4 | length 996.6
  Top Layer w5: P3.13 6464.21,1040 6481.81,1057.6 R5.1 6507.16,1059.77 U2.24 6564.77,1059.77 pad.0@6615,1110 ; U3.27@6529.53,1470.39 6529.53,1489.53 pad.0@6545,1505
  Signal Layer 1 w5: pad.0@6545,1505 6567.74,1482.26 6567.74,1314.27 6553.47,1300 6530,1300 6515.1,1285.1 6515.1,1194.9 6587.5,1122.5 6615,1122.5 pad.0@6615,1115
  Bottom Layer w5: pad.0@6545,1505 6552.09,1505 6559.59,1497.5 6560.71,1497.5 6582.75,1475.46 6629.56,1475.46 6648.39,1456.64 6648.39,1454.96 6656.5,1446.85 U9.4@6656.5,1424.21 ; pad.0@6615,1115 6618.29,1115 6618.29,1152.74 6627.6,1162.05 U6.4 ; U9.4@6654.63,1422.35 6657.4,1419.58 U9.4@6657.4,1418.82
TX: P3.12 pad.0@6392.72,1125 pad.0@6439.96,1561.02 U3.31 | length 668.6
  Top Layer w5: pad.0@6392.72,1125 6393.43,1125.71 P3.12 ; pad.0@6439.96,1561.02 6449.74,1551.24 6449.74,1471.52 U3.31 ; U3.31@6448.82,1472.09 U3.31@6449.61,1471.3
  Signal Layer 1 w5: pad.0@6387.8,1128.94 6389.26,1128.94 6445.3,1184.98 6460.57,1184.98 6485.02,1209.43 6485.02,1253.17 6432.26,1305.93 6432.26,1479.41 6449.9,1497.05 6449.9,1547.15 6439.96,1557.09 pad.0@6439.96,1561.02
VBAT: *.2 pad.0@6910.43,1469.49 pad.0@6951.77,1548.23 TP10.0 | length 121.3
  Signal Layer 1 w14: pad.0@6910.43,1469.49 6951.77,1510.83 pad.0@6951.77,1548.23
  Bottom Layer w14: *.2 6909.84,1470.08 pad.0@6910.43,1469.49
VBUS: *.3 C4.1 P3.1 pad.0@6272.64,1043.31 R1.2 U1.1 U1.3 U4.1 U4.3 | length 1579.2
  Top Layer w10: pad.0@6272.64,1043.31 6275.94,1040 P3.1
  Bottom Layer w16: U1.3 U1.3@6249.61,1154.53 ; C4.1 6285.79,1190.71 ; R1.2 6384.84,1299.26 6370.7,1285.12 6370.7,1260.27 6361.96,1251.53 6296.8,1251.53 6285.79,1240.51 6285.79,1190.71 ; U4.3 6392.72,1051.18 ; *.3 6944.29,1486.81 6917.32,1513.78 6885.33,1513.78 6884.16,1512.61 6866.07,1512.61 6835.63,1482.16 6835.63,1460.99 6798.85,1424.21 6798.85,1328.64 6771.36,1301.16 6750.24,1301.16 6676.09,1227 6634.84,1227 6612.77,1204.93 6610.4,1204.93 6602.79,1197.31 6602.79,1148.38 6587.72,1133.31 6532.92,1133.31 6489.17,1089.57 U4.1 6489.17,1049.21 6474.41,1034.45 6409.45,1034.45 6392.72,1051.18 ; U1.3@6249.61,1154.53 6285.79,1190.71 ; U1.3@6249.61,1154.53 6282.48,1154.53 6293.31,1143.7 6293.31,1101.38 6271.18,1079.25 U1.1 6277.2,1051.18 6392.72,1051.18
VC1: TP8.0 U6.1 U7.3 | length 420
  Bottom Layer w5: U6.1 6702.4,1138.02 6721.71,1157.33 6721.71,1221.71 6719.26,1224.16 6719.26,1248.26 6756.66,1285.66 6777.78,1285.66 6836.61,1344.49 U7.3 ; U7.3@6872.05,1340.55 U7.3@6887.8,1340.55
  Bottom Layer w8: 6778.85,1284.6 6785.88,1277.56 TP8.0
VC2: TP9.0 U7.5 U9.1 | length 622.2
  Bottom Layer w5: U9.1@6577.76,1524.61 6577.76,1539.98 6585.63,1547.85 6780.6,1547.85 6811.78,1516.68 6811.78,1460.81 6777.8,1426.83 6777.8,1373.26 6779.3,1371.76 6779.3,1335.69 6762.51,1318.9 U7.5 6694.88,1295.28 TP9.0
VCC: C3.1 C6.2 C7.1 C10.1 C11.2 C12.2 C14.2 P1.3 P2.3 P3.9 P6.1 pad.0@6309.06,1416.34 pad.0@6386.81,1099.41 pad.0@6457.68,1121.06 pad.0@6531.5,1029.53 pad.0@6654.53,1105.32 pad.0@6658.46,1298.23 pad.0@6676.18,1498.03 pad.0@6692.91,1200.79 pad.0@6757.87,1338.58 pad.0@6771.65,1514.76 pad.0@6822.83,1591.54 pad.0@6895.67,1286.42 R5.2 R6.2 R7.2 U2.8 U2.13 U3.4 U3.6 U3.18 U4.5 U5.11 U5.12 U6.3 U6.6 U7.8 U8.7 U8.15 U8.18 U9.3 | length 2126.1
  Top Layer w5: C6.2 6331.77,1373.62 6371.65,1373.62 ; U3.6 6376.57,1340.55 6371.65,1345.47 6371.65,1373.62 ; U3.4 6377.95,1379.92 6371.65,1373.62 ; U3.18 6629.78,1320.87 6633.5,1317.15 6639.55,1317.15 pad.0@6658.46,1298.23 ; pad.0@6771.65,1514.76 6769.69,1512.8 6769.69,1505.91 6756.16,1492.39 6756.16,1457.29 6745.06,1446.18 6745.06,1420.3 6745.67,1419.69 U8.7 ; R7.2 6817.85,1586.55 pad.0@6822.83,1591.54 ; U8.15 6889.37,1292.72 pad.0@6895.67,1286.42
  Top Layer w8: P2.3@6250,1360.24 6283.51,1393.75 C6.2 ; R5.2 6524.12,1022.15 pad.0@6531.5,1029.53 ; C7.1 6608.22,1225.01 6643.69,1260.48 6643.69,1271.3 6658.46,1286.08 pad.0@6658.46,1298.23 ; pad.0@6654.53,1105.32 6683.33,1079.46 U2.8 ; U2.13 6674.3,1191.03 6684.06,1200.79 pad.0@6692.91,1200.79 ; U8.18 6980.51,1400 P1.3@6987.2,1393.31
  Top Layer w10: P3.9 6373.74,1084.37 pad.0@6386.81,1099.41 ; U5.11 U5.12 6407.05,1569.33 P6.1@6414.82,1577.1 ; pad.0@6457.68,1121.06 6464.46,1127.85 R6.2
  Top Layer w12: pad.0@6309.06,1416.34 6311.64,1413.76 C6.2
  Signal Layer 2 w8: pad.0@6457.68,1121.06 6531.5,1047.24 pad.0@6531.5,1029.53
  Signal Layer 2 w10: pad.0@6386.81,1099.41 6436.02,1099.41 pad.0@6457.68,1121.06 ; pad.0@6658.46,1298.23 6702.76,1342.52 6753.94,1342.52 6757.87,1338.58 6766.06,1345.79 6766.06,1506.48 ; pad.0@6676.18,1498.03 6674.21,1494.76 6754.35,1494.76 6766.06,1506.48 ; pad.0@6771.65,1514.76 6766.06,1509.17 6766.06,1506.48
  Bottom Layer w8: pad.0@6457.68,1121.06 6489.17,1152.56 U4.5 ; C11.2 6560.18,1060.18 ; C10.1 6560.18,1071.56 6560.18,1060.18 ; pad.0@6654.53,1105.32 6627.6,1078.39 U6.3 6616.98,1073.82 6603.35,1060.18 6560.18,1060.18 ; pad.0@6692.91,1200.79 6702.4,1191.3 U6.6 ; C12.2@6930.12,1387.8 6981.69,1387.8 P1.3@6987.2,1393.31
  Bottom Layer w10: C14.2 6640.75,1391.73 U7.8@6710.63,1391.73 ; U9.3@6656.5,1526.57 6673.23,1509.84 pad.0@6676.18,1498.03 ; U7.8 6731.3,1395.67 6757.87,1369.09 pad.0@6757.87,1338.58
VM: C1.1 P3.3 pad.0@6282.48,1584.65 pad.0@6313.98,1090.55 R1.1 U1.5 U5.1 | length 1089.5
  Top Layer w10: pad.0@6282.48,1584.65 6297.79,1569.33 U5.1 ; pad.0@6313.98,1090.55 6314.7,1089.83 P3.3
  Signal Layer 1 w14: pad.0@6282.48,1584.65 6305.76,1561.37 6305.76,1483.91 6282.48,1460.63 6282.48,1122.05 pad.0@6313.98,1090.55
  Bottom Layer w14: pad.0@6282.48,1584.65 6298.23,1568.9 6310.04,1568.9 6316.93,1562.01 6316.93,1487.95 6284.45,1455.47 6284.45,1382.87 6317.91,1349.41 R1.1 ; pad.0@6313.98,1090.55 6313.98,1125 6318.24,1129.26 6358.44,1129.26 6369.57,1140.4 6369.57,1181.58
  Bottom Layer w16: 6369.57,1181.58 6382.05,1194.06 C1.1@6415,1194.06
pads on no net: *.1 *.NC A1.2 B1.6 U1.4 U2.1 U2.2 U2.3 U2.4 U2.5 U2.6 U2.7 U2.14 U2.15 U2.16 U2.17 U2.19 U2.21 U2.22 U4.4

## Polygon pours and split planes (outlines as drawn)
GND on Signal Layer 2 "GND" (solid, remove dead copper, pour order 4): 6221.98,1005.21 6222.27,1004.92 6760.83,1004.92 6760.83,1228.35 6762.8,1230.32 7015.75,1230.32 7015.75,1598.76 7016.98,1600 6217.85,1600
VCC on Signal Layer 1 "POWER" (solid, remove dead copper, pour order 6): 6222.07,1002.61 6219.24,1005.43 6219.24,1601.75 7015.68,1601.75 7015.76,1601.83 7015.75,1601.82 7015.75,1255.91 6739.17,1255.91 6732.28,1249.02 6732.28,1002.95
GND on Top Layer "GND-TOP" (solid, remove dead copper, pour order 5): 6760.83,1004.92 6760.83,1228.35 7015.75,1228.35 7014.76,1229.33 7014.76,1329.72 6718.5,1329.72 6716.54,1327.76 6716.54,1005.91

## Silkscreen, mask and mechanical layers (free items; w line width, h text height)
Bottom Overlay:
  text "1" at 6910.43,1562.99 h30
  text "A1" at 6322.83,1552.17 h30
  text "gnd" at 6680.12,1541.34 h30
  text "vcc" at 6490.16,1536.42 h30
  text "A2" at 6330.71,1503.94 h30
  text "B1" at 6327.76,1454.72 h30
  text "B2" at 6326.77,1406.5 h30
  text "2" at 6396.65,1377.95 h30
  text "3" at 6530.51,1273.62 h30
  text "gnd" at 6954.72,1264.76 h30
  text "9" at 6706.69,1246.06 h30
  text "8" at 6843.5,1243.11 h30
  text "4" at 6554.13,1222.44 h30
  text "+" at 6406.5,1206.69 h30
  text "gnd" at 6274.61,1205.71 h30 r270
  text "Artemd" at 7007.87,1185.04 h30
  text "+" at 6385.83,1179.13 h30
  text "5" at 6602.79,1178.15 h30
  text "@mit.edu" at 7008.86,1144.68 h30
  text "Cont" at 6868.11,1066.93 h30
  text "Motor" at 7006.89,1065.94 h30
  text "+" at 6599.41,1057.09 h30
  text "V2.0" at 7006.89,1023.62 h30
Mechanical 1:
  circle w5: c6344.49,1664.37 r39.37
  lines w3.94: 6223.33,1600 6222.19,1601.13 ; 6285.43,1602.58 6223.64,1602.58 6222.19,1601.13 ; 6285.43,1604.55 6285.43,1664.37 ; 6402.56,1607.28 7019.69,1607.28 7019.69,1001.71 6552.13,1001.71 6552.13,941.89 ; 6403.5,1663.42 6403.54,1607.28 ; 6434.06,942.84 6434.06,1002.95 6432.01,1005 6222.19,1005 6222.19,1601.13 ; 6760.83,1231.3 6762.8,1229.33
  lines w5: 6285.43,1664.37 cw(c6344.46,1662.47) 6403.5,1663.42 ; 6434.06,942.84 ccw(c6493.1,943.79) 6552.13,941.89
Mechanical 13:
  lines w15: 6411.42,1710.63 6451.77,1750.98 6451.77,1751.97
  text "0.0393 inch Thick, 35um copper" at 5891.73,1986.22 h60
  text "M1.6 Holes" at 6395.67,1771.65 h60

## Dimensions
6222.19,1005 to 7019.69,1001.71 on Mechanical 13
6344.46,1724.33 to 6493.1,881.93 on Mechanical 13

## Text inside footprints (layer, text, board x,y; h text height)
A1: Top Overlay "-" at 6936.4,1160.97 h30
B1: Top Overlay "o" at 6871.85,1231.96 h30 r270
U2: Top Overlay "1" at 6544.74,1014 h30 r90
U5: Top Overlay "o" at 6282.89,1585.29 h30